# Altium PCB micromouse.PcbDoc (part 2 of 2)
Units mm, origin at the board's own origin, x right, y up, seen from the top; angles counter-clockwise.
Board outline 70.05 x 99.97 mm, 2 copper layers (Top, Bottom); 176 components, 116 nets, 553 pads, 232 vias.
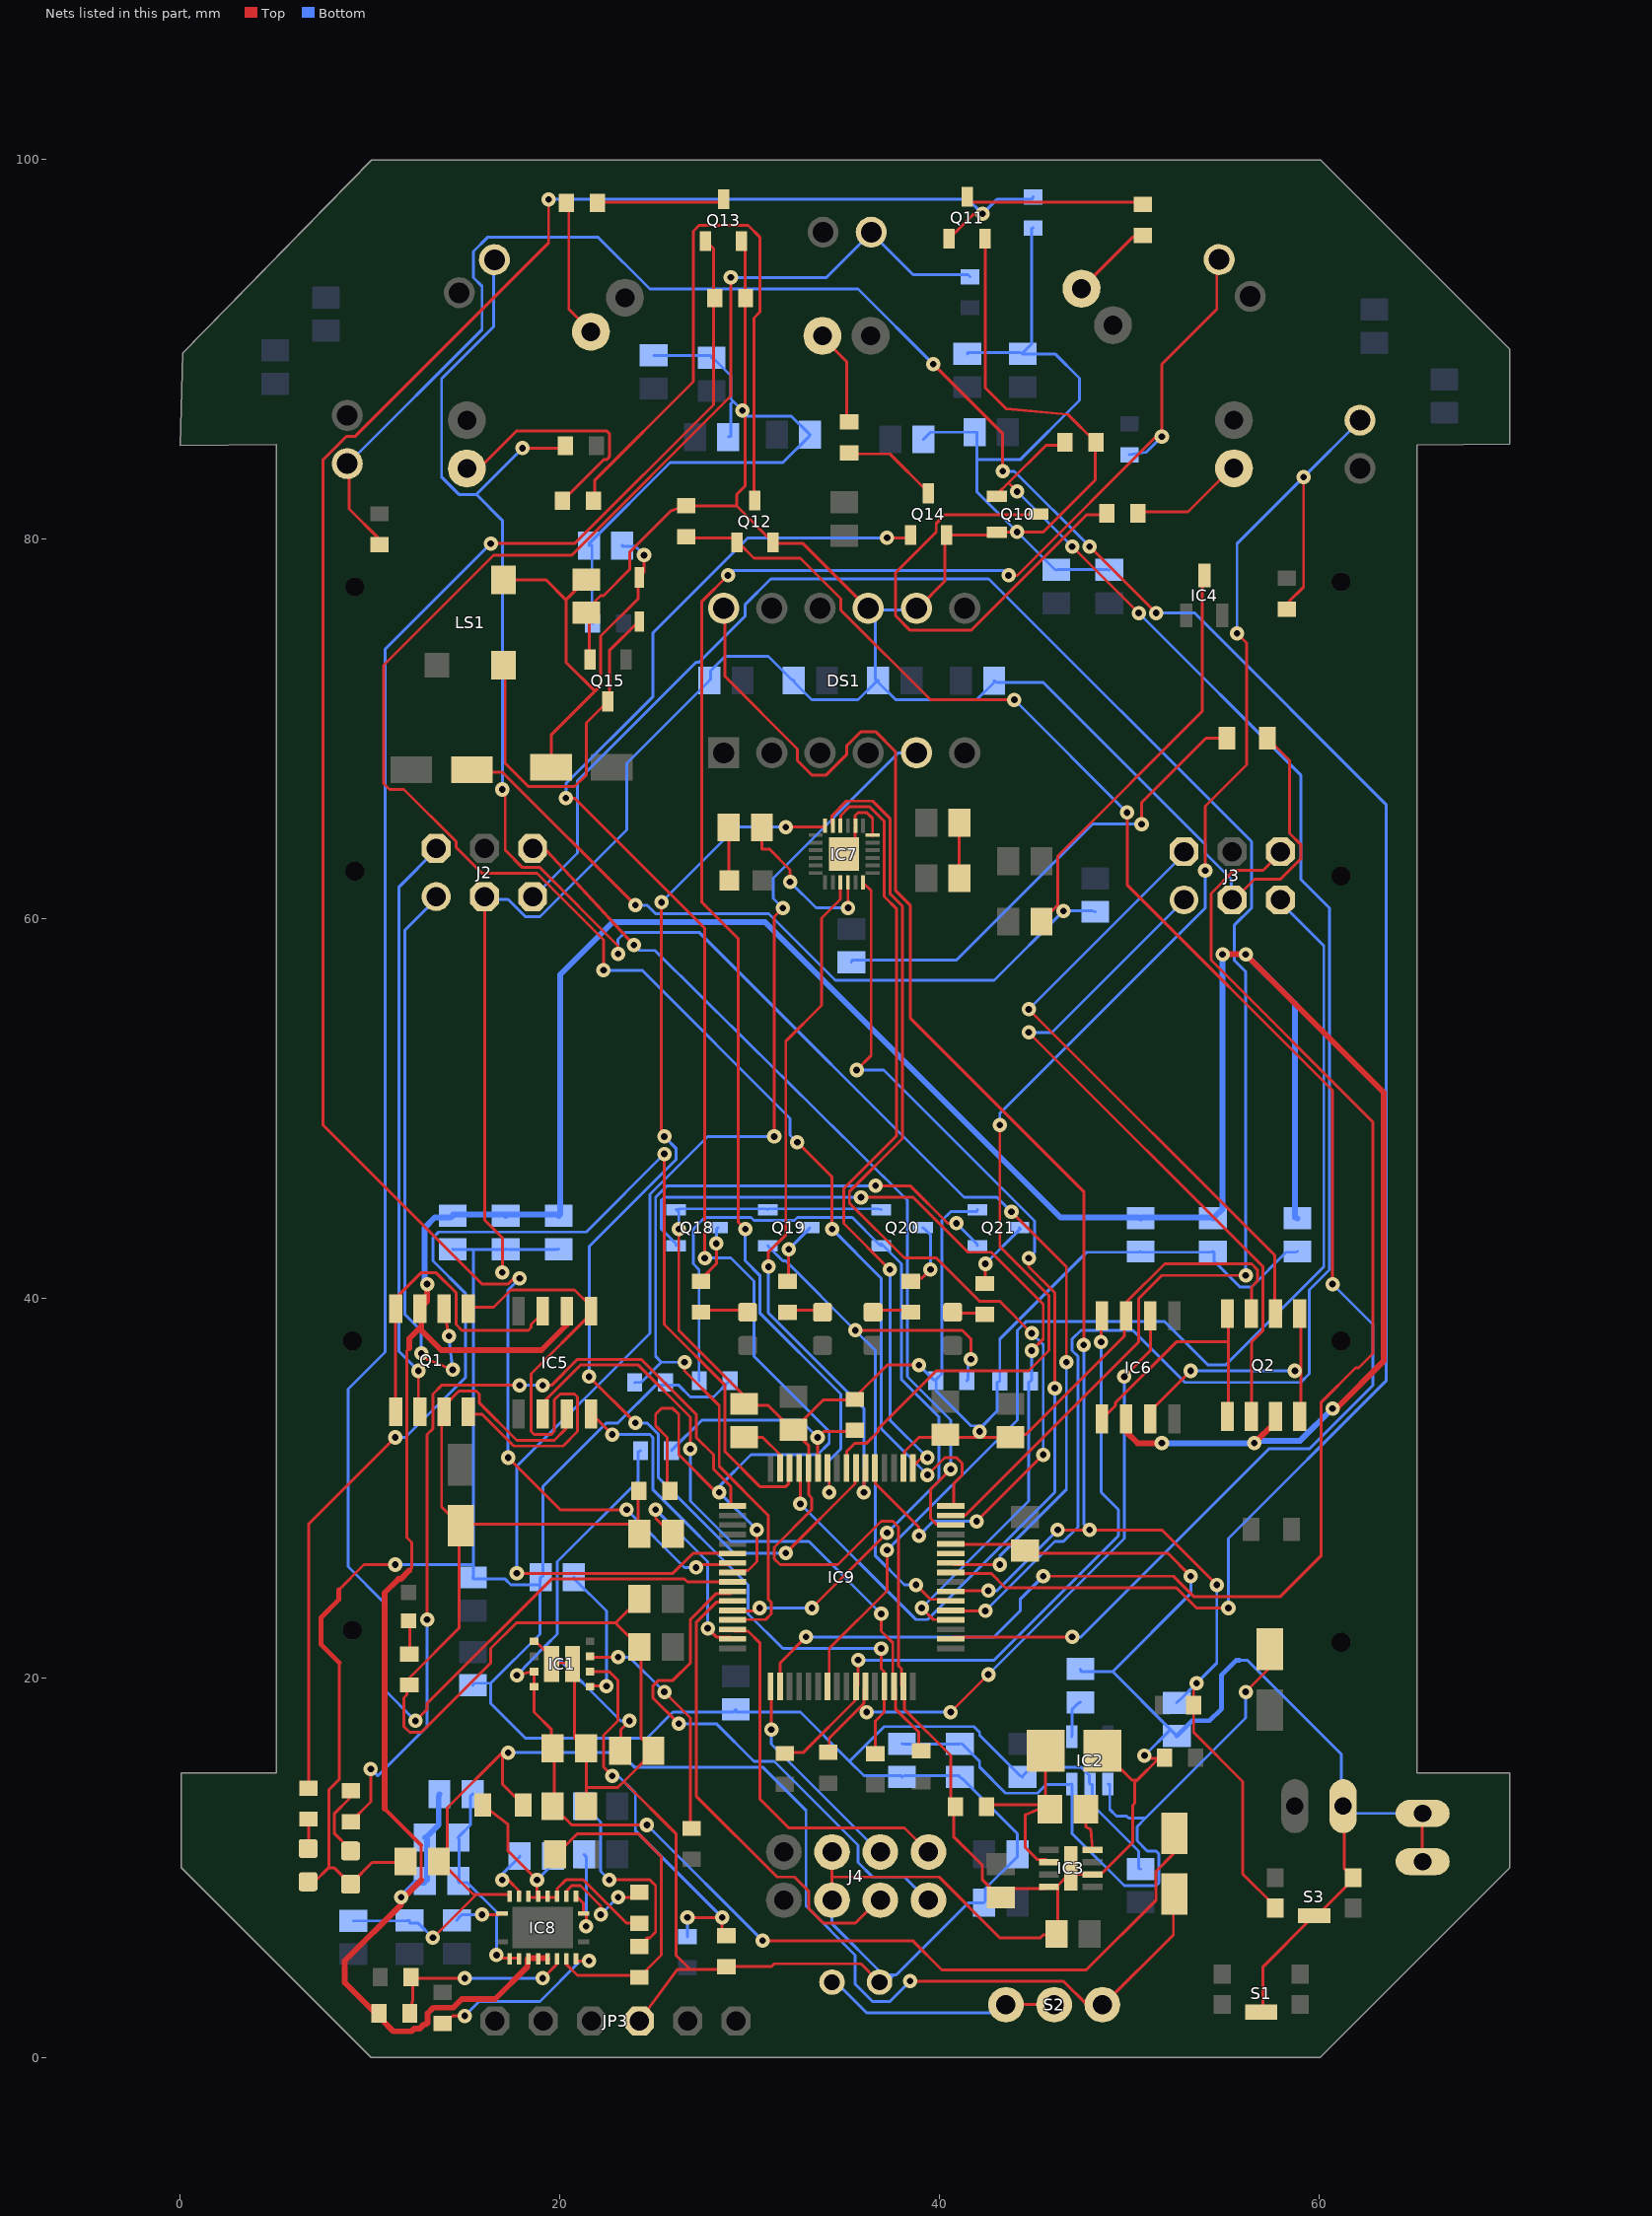
[diagram p2: the nets of this part, all layers, seen from the top]

## Via types
v1: diameter 0.756/0.756 (per signal layer), hole 0.35, Top to Bottom, 232 vias

## Nets (pads, with @x,y where several pads share a name; then routed paths per layer and width w, separated by ;. In a path a pad name is that pad's centre, name@x,y a point inside that pad or via, vN(x,y) a via of type N, cw(c..) or ccw(c..) an arc to the next point about the centre after c; other vN are vias at no path point) (continued)
GND: C3.3V_1.1 C3.3V_2.1 C3.3V_7.1 C5V4_5.2 C5V_2.1 C_3.3V_5.1 C_3.3V_6.1 C_5V4_4.1 C_5V_1.1 C_A3.3V_1.1 C_A3.3V_3.1 C_BAT.2 C_DSP1.2 C_DSP2.2 C_DSP3.2 C_EM1.2 C_EM2.2 C_EM3.2 C_EM4.2 C_EM5.2 C_EM6.2 C_EM7.2 C_EM8.2 C_EM9.2 C_EM10.2 C_EM11.2 C_EM12.1 C_M1.2 C_M2.1 C_M4.1 C_M5.2 C_MB_L.1 C_MB_R.1 C_RST.2 C_SS1.1 C_V1.1 C_V2.2 C_V3.2 C_V4.2 C_VA1.2 C_VA2.2 C_VBAT1.2 C_VBAT2.2 C_VBAT3.1 C_VBAT4.1 C_VCAP1.1 C_VCAP2.2 CNR.1 CVC1.+ D22.C D23.C DS1.8 DS1.9 IC1.5 IC1.9 IC1.10 IC2.2 IC3.4 IC3.6 IC3.9 IC5.3 IC6.3 IC9.12 IC9.18 IC9.28 IC9.63 J1.2 J2.3 J3.3 J4.3 J4.4 JP1.1 JP2.1 JP2.2 JP3.3 L1.1 L5.1 Q1.3 Q2.3 Q10.2 Q11.2 Q12.2 Q13.2 Q14.2 Q15.2 Q18.2 Q19.2 Q20.2 Q21.2 R_FBB2.1 R_LED1_PULLUP1.1 R_LED1_PULLUP2.1 R_LED1_PULLUP3.1 R_LED1_PULLUP.1 R_LED6.2 R_PWR1.1 R_R9.1 R_R11.1 R_R13.1 R_R15.1 R_R16.1 R_R18.1 R_VM2.1 RB1.1 S1.5 S3.4 S3.5 | length 730
  Top w0.152: D23.C@6.753,9.202 D23.C@6.731,9.255 7.074,9.255 7.819,10 ; 7.819,9.964 7.819,10 ; 8.342,24.635 9.674,25.966 v1(11.325,25.966) ; 8.377,20.79 8.377,14.655 7.819,14.097 7.819,10 ; D22.C@8.886,9.202 D22.C@8.97,9.128 ; C_VBAT2.2@11.872,10.32 11.782,10.269 10.105,10.269 9.039,9.202 D22.C@8.97,9.128 ; J2.3@16.02,61.164 16.049,61.018 16.049,44.102 16.963,43.188 v1(16.963,41.359) ; IC1.5@18.638,21.934 18.64,21.852 18.792,21.852 19.554,21.09 19.554,20.785 IC1.9@19.563,20.734 19.707,20.785 20.621,20.785 IC1.10@20.663,20.734 20.773,20.632 20.773,16.822 21.231,16.365 C_VBAT1.2@21.369,16.289 21.383,16.213 21.383,14.232 ; IC5.3@20.367,33.898 20.316,33.891 20.316,33.129 19.707,32.52 17.725,32.52 15.744,34.501 15.744,34.958 15.592,35.11 14.677,35.11 13.915,34.348 13.915,34.044 Q1.3@13.89,34.024 13.763,33.891 13.763,29.014 14.677,28.1 L5.1@14.779,28.024 ; C_VBAT3.1@21.369,13.241 21.383,13.317 21.383,14.232 ; Q15.2@21.576,73.65 21.535,73.668 21.535,75.954 21.383,76.106 C_EM12.1@21.383,76.12 21.383,76.258 22.145,77.02 22.297,77.02 23.669,78.392 23.669,79.306 25.85,81.487 R_R13.1@26.654,81.764 26.692,81.745 29.308,81.745 ; R_R16.1@24.163,29.853 24.126,29.776 C_VCAP2.2@24.126,28.1 ; C_VA1.2@24.191,24.163 23.009,22.981 23.009,22.893 ; JP3.3@24.193,1.923 26.181,4.63 26.869,4.63 ; v1(26.26,43.645) 26.26,38.311 29.613,34.958 29.613,34.501 C_VCAP1.1@29.709,34.436 29.765,34.348 30.984,34.348 32.203,33.129 C_BAT.2@32.305,33.067 ; Q13.2@29.572,95.707 29.613,95.613 29.765,95.461 29.765,92.718 R_R15.1@29.783,92.697 29.765,92.565 v1@29.765,86.774 ; v1(29.613,86.774) v1@29.765,86.774 ; J4.3@34.337,8.288 34.337,9.507 ; J4.4@34.337,10.828 34.337,9.507 ; DS1.9@36.242,76.36 36.166,76.411 32.813,79.764 31.289,79.764 Q12.2@31.223,79.832 31.137,79.916 29.308,81.745 ; J1.2@36.837,3.97 36.775,4.021 35.861,4.935 31.289,4.935 31.137,4.783 28.851,4.783 R_FBB2.1@28.764,4.781 28.698,4.63 26.869,4.63 ; IC9.18@38.095,31.056 38.147,31.148 38.147,31.91 38.909,32.672 40.281,32.672 C_V3.2@40.306,32.813 40.433,32.672 v1@42.109,32.672 ; DS1.8@38.782,76.36 38.909,76.411 40.281,77.782 40.281,80.068 Q14.2@40.367,80.213 40.433,80.221 42.871,80.221 Q10.2@43.016,80.363 43.024,80.373 v1(44.091,80.373) 45.462,80.373 48.205,83.116 48.205,84.945 R_R9.1@48.234,85.095 46.76,86.569 43.523,86.859 42.414,87.968 42.414,95.766 Q11.2@42.399,95.834 ; v1(38.909,36.482) 37.233,36.482 35.556,34.806 R_VM2.1@35.531,34.669 35.404,34.653 33.88,34.653 32.356,33.129 C_BAT.2@32.305,33.067 ; IC9.12@40.595,27.056 40.738,27.033 44.091,27.033 44.395,26.728 C_V2.2@44.497,26.717 44.548,26.576 52.015,26.576 v1(53.235,25.357) ; v1(42.109,32.977) v1@42.109,32.672 ; CVC1.+@48.588,16.161 50.126,14.623 50.424,14.623 ; v1(50.796,15.908) 50.796,15.756 R_LED6.2@51.557,15.756 ; R_LED6.2@51.851,15.793 51.711,15.756 R_LED6.2@51.557,15.756 ; J3.3@55.419,60.993 55.521,61.018 56.587,62.085 57.959,62.085 59.026,63.152 59.026,63.914 58.442,64.498 58.442,68.336 L1.1@57.267,69.511 ; Q2.3@56.435,39.194 56.435,40.597 56.74,40.902 56.74,41.511 56.435,41.816 51.863,41.816 49.882,39.835 49.882,39.073 IC6.3@49.831,39.066 49.729,38.92 49.729,38.006 44.548,32.824 43.786,32.824 C_V4.2@43.735,32.686 43.633,32.672 v1@42.109,32.672 ; S1.5@56.943,2.389 57.045,2.497 57.045,4.783 59.635,7.374 59.737,7.469 59.788,7.374 61.769,9.355 S3.4@61.787,9.469 61.769,9.507 61.312,9.964 61.312,13.165 JP1.1@61.261,13.241 ; JP2.1@65.452,10.32 65.427,10.422 65.427,12.86 JP2.2@65.452,12.86 ; 7.819,10 8.098,10 D22.C@8.97,9.128 ; L5.1@14.779,28.024 14.83,28.1 C_VCAP2.2@24.126,28.1 ; L5.1@14.779,28.024 14.677,27.948 14.677,22.614 12.087,20.023 12.087,19.718 12.063,19.63 11.934,19.566 11.934,19.108 11.782,18.956 11.782,17.432 12.087,17.127 12.696,17.127 16.354,20.785 16.354,21.547 17.7,22.893 23.009,22.893 ; 21.383,14.232 23.059,14.232 23.364,14.536 ; 23.009,22.893 23.009,22.805 C_VA2.2@24.191,21.623 24.279,21.547 24.279,16.822 24.888,16.213 C_VBAT4.1@24.925,16.162 24.888,16.06 23.364,14.536 ; 23.364,14.536 26.107,11.793 26.107,5.392 26.869,4.63 ; C_VCAP2.2@24.126,28.1 C_VCAP2.2@24.191,27.592 24.126,27.643 C_VCAP2.2@24.126,28.1 ; 29.308,81.745 29.308,82.354 29.765,82.812 v1@29.765,86.774 ; C_BAT.2@32.305,33.067 32.356,32.977 33.118,32.215 33.118,31.148 IC9.28@33.095,31.056 33.118,30.996 33.118,29.624 33.27,29.472 33.27,28.862 31.289,26.881 31.289,26.271 31.594,25.966 34.642,25.966 36.928,28.252 37.537,28.252 37.842,27.948 37.842,20.632 37.995,20.48 37.995,19.566 IC9.63@38.095,19.556 38.147,19.413 38.147,18.346 40.585,15.908 40.585,13.48 RB1.1@40.835,13.21 40.738,13.147 40.738,11.641 42.262,10.117 42.262,9.355 43.176,8.44 C3.3V_2.1@43.227,8.429 43.329,8.44 43.786,8.898 45.615,8.898 IC3.4@45.76,8.994 ; 34.337,9.507 39.976,9.507 43.176,6.307 45.31,6.307 45.462,6.459 46.072,6.459 C_5V_1.1@46.162,6.51 46.224,6.612 IC3.4@46.224,9.05 ; IC3.4@45.76,8.994 IC3.4@46.224,9.05 ; IC3.4@45.76,8.994 45.767,9.05 IC3.4@46.224,9.05 ; IC3.4@46.224,9.05 IC3.9@46.834,9.66 ; IC3.9@46.834,9.66 IC3.9@46.91,9.969 46.834,9.964 IC3.9@46.834,9.66 ; IC3.9@46.834,9.66 48.053,9.66 IC3.6@48.06,9.644 48.205,9.66 48.51,9.66 50.187,11.336 50.187,13.291 50.287,13.391 50.287,14.486 50.424,14.623 ; 50.424,14.623 R_LED6.2@51.557,15.756
  Top w0.254: 8.342,24.635 8.342,24.111 7.419,23.188 7.419,21.748 8.377,20.79
  Bottom w0.152: v1(11.325,25.966) 15.439,25.966 ; C_MB_L.1@14.351,42.592 14.373,42.578 15.439,42.578 ; C_5V4_4.1@15.414,19.605 15.439,19.718 16.354,19.718 ; J2.3@16.02,61.164 16.049,61.018 17.268,61.018 18.183,60.104 18.945,60.104 23.517,64.676 23.517,68.181 27.784,72.448 C_DSP3.2@27.874,72.55 27.936,72.601 27.936,73.058 28.698,73.82 30.984,73.82 32.203,72.601 C_DSP1.2@32.319,72.55 32.356,72.448 33.27,71.534 35.709,71.534 36.623,72.448 C_DSP2.2@36.764,72.55 ; v1(16.963,41.359) C_M2.1@16.963,42.578 ; C_M1.2@19.939,42.592 19.859,42.578 17.268,42.578 C_M2.1@17.145,42.592 ; R_R18.1@21.717,75.553 21.688,75.649 21.688,79.662 C_EM11.2@21.524,79.662 21.535,79.764 25.803,84.031 31.746,84.031 33.118,85.402 C_EM5.2@33.18,85.504 33.118,85.555 32.203,86.469 29.613,86.469 v1(29.613,86.774) 29.127,87.26 ; C_EM7.2@24.939,89.681 25.041,89.67 27.936,89.67 C_EM8.2@27.987,89.554 28.089,89.517 29.003,88.603 29.003,87.384 29.127,87.26 ; v1(26.26,43.645) 26.26,44.559 Q18.2@26.125,44.671 26.26,44.712 30.832,44.712 Q19.2@30.951,44.671 30.984,44.712 36.775,44.712 Q20.2@36.92,44.671 ; C_EM6.2@28.862,85.377 29.003,85.402 29.003,87.136 29.127,87.26 ; R_LED1_PULLUP2.1@28.97,35.66 28.851,35.568 28.089,34.806 26.869,34.806 26.26,35.415 25.65,35.415 R_LED1_PULLUP3.1@25.569,35.562 25.498,35.415 25.041,35.415 23.059,33.434 22.45,33.434 19.097,30.081 19.097,25.357 C_SS1.1@18.984,25.306 ; J4.3@34.337,8.288 34.337,7.043 37.029,4.351 37.587,4.351 ; J1.2@36.775,4.021 J1.2@36.837,3.97 37.206,3.97 37.587,4.351 ; DS1.8@38.782,76.36 38.757,76.258 36.928,76.258 DS1.9@36.623,75.954 ; v1(38.909,36.482) 39.671,35.72 R_LED1_PULLUP1.1@39.803,35.653 ; C_EM10.2@39.149,85.25 39.53,85.631 C_EM9.2@41.844,85.631 41.957,85.631 41.957,84.183 ; C_EM3.2@41.463,89.761 41.5,89.822 44.243,89.822 C_EM4.2@44.384,89.761 ; Q21.2@42,44.671 41.957,44.559 40.585,44.559 40.128,44.102 40.128,36.025 39.823,35.72 R_LED1_PULLUP1.1@39.803,35.653 ; v1(42.109,32.977) v1@42.109,33.282 ; R_R11.1@44.932,96.398 44.853,96.375 44.853,90.279 44.395,89.822 C_EM4.2@44.384,89.761 ; CNR.1@47.418,20.466 47.443,20.328 49.12,20.328 ; C_EM2.2@48.942,78.378 48.815,78.392 46.224,78.392 C_EM1.2@46.148,78.378 46.072,78.392 v1(44.091,80.373) 41.957,82.507 41.957,84.183 ; C_3.3V_6.1@50.593,9.925 50.491,9.964 50.491,10.879 48.053,13.317 48.053,14.384 IC2.2@47.919,14.401 47.901,14.536 47.901,14.841 47.443,15.298 44.853,15.298 44.395,14.841 C_A3.3V_3.1@44.37,14.779 44.243,14.841 42.109,16.975 42.109,17.127 41.805,17.432 37.08,17.432 35.251,15.603 ; v1(50.796,15.908) C_RST.2@52.168,17.28 ; v1(53.235,25.357) 53.235,24.442 49.12,20.328 ; J3.3@55.419,60.993 55.368,61.018 55.368,62.085 53.997,63.457 53.997,63.914 45.462,72.448 43.024,72.448 C5V_2.1@42.874,72.54 42.871,72.448 41.957,71.534 37.69,71.534 36.775,72.448 C_DSP2.2@36.764,72.55 ; 55.8,20.937 56.206,20.937 61.159,15.984 61.159,13.317 JP1.1@61.261,13.241 61.312,13.165 61.617,12.86 JP2.2@65.452,12.86 ; C_MB_R.1@58.848,42.465 58.721,42.426 58.264,42.426 56.435,40.597 55.825,40.597 54.454,41.968 54.454,42.426 C_M4.1@54.403,42.465 54.301,42.426 50.644,42.426 C_M5.2@50.593,42.465 50.491,42.426 47.748,42.426 43.176,37.854 43.176,35.72 R_LED1_PULLUP.1@43.171,35.635 43.024,35.568 43.024,34.044 42.262,33.282 v1@42.109,33.282 ; 15.439,25.966 15.439,42.578 ; 15.439,25.966 15.439,25.357 C5V4_5.2@15.414,25.292 15.439,25.204 17.116,25.204 17.421,24.9 C_SS1.1@18.945,24.9 ; 15.439,42.578 C_M2.1@16.963,42.578 ; 16.354,19.718 16.354,18.651 18.183,16.822 24.583,16.822 25.955,18.194 29.155,18.194 C_V1.1@29.257,18.335 29.308,18.194 32.661,18.194 35.251,15.603 ; 16.354,19.718 18.945,22.309 C_SS1.1@18.945,24.9 ; C_M2.1@16.963,42.578 C_M2.1@17.145,42.592 ; C_M2.1@16.963,42.578 17.116,42.578 C_M2.1@17.145,42.592 ; C_SS1.1@18.945,24.9 C_SS1.1@18.984,25.306 ; C_SS1.1@18.945,24.9 18.945,25.204 C_SS1.1@18.984,25.306 ; 35.251,15.603 36.013,14.841 37.995,14.841 C_3.3V_5.1@38.02,14.779 38.147,14.841 41.043,14.841 C_A3.3V_1.1@41.068,14.779 41.195,14.689 44.091,11.793 44.091,10.726 C3.3V_1.1@44.102,10.701 44.091,10.574 42.414,8.898 42.414,8.288 C3.3V_7.1@42.352,8.161 42.262,8.136 41.5,8.136 37.715,4.351 37.587,4.351 ; DS1.9@36.623,75.954 DS1.9@36.242,76.36 36.318,76.258 DS1.9@36.623,75.954 ; DS1.9@36.623,75.954 36.623,72.601 C_DSP2.2@36.764,72.55 ; R_LED1_PULLUP1.1@39.803,35.653 39.823,35.568 39.823,35.11 41.652,33.282 v1@42.109,33.282 ; 41.957,84.183 44.243,84.183 47.367,87.307 47.367,88.476 46.081,89.761 C_EM4.2@44.384,89.761 ; 49.12,20.328 C_RST.2@52.168,17.28 ; C_RST.2@52.168,17.28 C_RST.2@52.498,16.938 52.473,16.975 C_RST.2@52.168,17.28
  Bottom w0.254: C_RST.2@52.498,16.938 53.302,17.742 54.224,17.742 54.859,18.377 54.859,20.155 55.641,20.937 55.8,20.937
INT: IC7.12 IC9.29 | length 58.7
  Top w0.152: IC9.29@32.595,31.056 32.661,30.996 v1(32.661,29.167) ; v1(35.632,52.027) 36.394,52.789 36.394,61.483 IC7.12@35.972,61.906 ; v1(44.7,42.121) 44.7,41.664 46.072,40.292 v1(46.072,35.263)
  Bottom w0.152: v1(32.661,29.167) 38.757,23.071 39.366,23.071 46.072,29.776 v1(46.072,35.263) ; v1(35.632,52.027) 37.059,52.027 45.005,44.08 45.005,42.426 v1(44.7,42.121)
JTCK: IC9.49 J4.6 | length 11.1
  Top w0.152: IC9.49@31.095,19.556 31.137,19.413 v1(31.137,17.28)
  Bottom w0.152: v1(31.137,17.28) 31.137,16.518 36.775,10.879 J4.6@36.877,10.828
JTMS: IC9.46 J4.8 | length 20
  Top w0.152: IC9.46@29.095,22.556 29.155,22.461 29.917,22.461 30.527,21.852 30.527,13.622 32.051,12.098 38.147,12.098 J4.8@39.417,10.828
L_EMITTER: IC9.2 Q12.1 R_R13.2 | length 92.9
  Top w0.152: R_R13.2@26.654,80.134 26.692,80.068 29.155,80.068 29.308,79.916 Q12.1@29.323,79.832 29.46,79.764 30.222,79.002 32.661,79.002 34.794,76.868 34.794,76.258 39.519,71.534 v1(43.938,71.534) ; IC9.2@40.595,22.056 40.738,22.156 v1(46.986,22.156) ; v1(49.882,65.59) 49.882,61.78 60.702,50.96 v1(60.702,40.749)
  Bottom w0.152: v1(43.938,71.534) v1(49.882,65.59) ; v1(46.986,22.156) 47.443,22.156 57.349,32.062 59.483,32.062 62.836,35.415 62.836,38.616 v1(60.702,40.749)
L_RECEIVER_1: IC9.9 Q8.1 R_R6.2 | length 142.4
  Top w0.152: Q8.1@8.796,83.976 8.886,83.878 8.886,81.592 10.41,80.068 10.41,79.764 R_R6.2@10.491,79.7 ; v1(39.671,89.212) 43.329,85.555 v1(43.329,83.574) ; IC9.9@40.595,25.556 40.738,25.509 42.719,25.509 43.481,24.747 52.473,24.747 53.539,23.68 v1(55.216,23.68) ; v1(47.901,79.611) v1(51.406,76.106)
  Bottom w0.152: Q8.1@8.796,83.976 8.886,84.031 15.897,91.041 15.897,93.327 15.439,93.784 15.439,95.156 16.201,95.918 21.993,95.918 24.736,93.175 35.709,93.175 v1(39.671,89.212) ; v1(43.329,83.574) 43.938,83.574 v1(47.901,79.611) ; v1(51.406,76.106) 53.438,76.106 63.522,66.022 63.522,35.644 55.216,27.338 v1(55.216,23.68)
LED1: IC9.4 Q18.1 R_LED1_PULLUP.2 | length 45.7
  Top w0.152: v1(35.861,45.321) 38.604,45.321 41.5,42.426 42.719,42.426 45.462,39.682 45.462,37.854 v1(44.853,37.244) ; v1(39.061,23.68) 39.671,23.071 40.585,23.071 IC9.4@40.595,23.056
  Bottom w0.152: Q18.1@26.125,42.771 26.107,42.883 25.345,43.645 25.345,45.169 25.498,45.321 v1(35.861,45.321) ; v1(39.061,23.68) 44.7,29.319 44.7,35.568 R_LED1_PULLUP.2@44.801,35.635 44.853,35.72 v1(44.853,37.244)
LED2: IC9.6 Q19.1 R_LED1_PULLUP1.2 | length 32.4
  Top w0.152: v1(35.556,38.311) 41.195,38.311 41.652,37.854 v1(41.652,36.787) ; v1(38.757,24.9) 39.519,24.138 40.585,24.138 IC9.6@40.595,24.056
  Bottom w0.152: Q19.1@30.951,42.771 30.984,42.73 31.746,41.968 31.899,41.968 v1(35.556,38.311) 36.623,37.244 36.623,26.424 38.147,24.9 v1(38.757,24.9) ; R_LED1_PULLUP1.2@41.433,35.653 41.5,35.72 41.5,36.634 v1(41.652,36.787)
LED3: IC9.44 Q20.1 R_LED1_PULLUP2.2 | length 46.6
  Top w0.152: IC9.44@29.095,23.556 29.155,23.528 30.375,23.528 v1(30.527,23.68) ; v1(33.27,23.68) v1(37.233,27.643)
  Bottom w0.152: R_LED1_PULLUP2.2@27.34,35.66 27.327,35.72 27.327,41.511 27.022,41.816 27.022,43.645 27.631,44.254 30.07,44.254 30.222,44.102 32.356,44.102 32.508,44.254 35.404,44.254 36.775,42.883 Q20.1@36.92,42.771 36.928,42.883 37.995,41.816 37.995,35.72 39.976,33.739 39.976,30.386 v1(37.233,27.643) ; v1(30.527,23.68) v1(33.27,23.68)
LED4: IC9.45 Q21.1 R_LED1_PULLUP3.2 | length 47.8
  Top w0.152: v1(26.565,36.634) 26.565,36.177 28.393,34.348 28.393,31.148 30.984,28.557 30.984,24.138 31.137,23.985 31.137,23.376 30.832,23.071 29.155,23.071 IC9.45@29.095,23.056 ; v1(36.623,45.931) 38.452,45.931 40.433,43.95 v1(40.89,43.95)
  Bottom w0.152: R_LED1_PULLUP3.2@23.939,35.562 23.974,35.568 24.279,35.568 25.345,36.634 ; v1(26.565,36.634) 25.345,36.634 ; v1(36.623,45.931) 25.65,45.931 25.041,45.321 25.041,36.939 25.345,36.634 ; v1(40.89,43.95) 41.957,42.883 Q21.1@42,42.771
LED7: IC9.30 R_LED8.1 | length 69.5
  Top w0.152: R_LED8.1@6.752,14.191 6.753,14.232 6.753,28.1 v1(11.325,32.672) ; v1(25.498,47.607) 25.498,38.616 28.698,35.415 28.698,31.91 30.527,30.081 31.899,30.081 32.051,30.234 32.051,30.996 IC9.30@32.095,31.056
  Bottom w0.152: v1(11.325,32.672) 11.858,32.672 15.033,35.847 15.033,40.241 13.306,41.968 13.306,43.188 13.611,43.492 21.383,43.492 v1(25.498,47.607)
LED8: IC9.33 R_LED9.2 | length 46.5
  Top w0.152: R_LED9.2@8.982,12.42 10.033,13.471 v1(10.033,15.203) ; v1(13.001,23.071) 13.001,32.824 13.306,33.129 13.306,34.958 13.763,35.415 v1(17.878,35.415) ; v1(19.097,35.415) 19.554,35.415 20.926,36.787 24.279,36.787 27.174,33.891 27.174,32.672 28.089,31.758 28.089,30.996 29.003,30.081 29.003,29.167 IC9.33@29.095,29.056
  Bottom w0.152: v1(10.033,15.203) 10.41,14.841 13.001,17.432 v1(13.001,23.071) ; v1(17.878,35.415) v1(19.097,35.415)
LENCHA: IC9.14 J2.6 | length 46.9
  Top w0.152: J2.6@18.56,63.704 18.64,63.609 19.275,63.609 v1(23.895,58.616) ; v1(40.585,30.996) 39.519,29.929 39.519,28.405 39.823,28.1 40.585,28.1 IC9.14@40.595,28.056
  Bottom w0.152: v1(23.895,58.616) 24.16,58.351 24.996,58.328 38.299,45.169 38.299,35.872 40.585,33.586 v1(40.585,30.996)
LENCHB: IC9.15 J2.5 | length 98.7
  Top w0.152: IC9.15@40.595,28.556 40.738,28.557 41.347,28.557 50.491,37.701 50.491,39.987 51.711,41.206 v1(56.13,41.206)
  Bottom w0.152: J2.5@18.56,61.164 18.64,61.171 20.926,63.457 20.926,67.267 27.174,73.515 27.327,73.515 29.765,75.954 29.765,76.563 31.111,77.909 42.592,77.909 56.435,64.066 56.435,60.561 55.521,59.647 55.521,57.818 56.13,57.208 v1(56.13,41.206)
LF_EMITTER: IC9.5 Q10.1 R_R9.2 | length 91.8
  Top w0.152: IC9.5@40.595,23.556 40.738,23.528 v1(42.414,23.528) ; Q10.1@43.016,82.263 43.024,82.354 43.633,82.964 ; v1(44.091,82.507) 43.633,82.964 ; R_R9.2@46.604,85.095 46.529,84.945 45.615,84.945 43.633,82.964 ; v1(46.986,79.611) v1(50.491,76.106)
  Bottom w0.152: v1(42.414,23.528) 46.072,27.186 46.529,27.186 47.291,27.948 47.291,36.939 46.986,37.244 46.986,37.854 47.443,38.311 50.187,38.311 52.93,35.568 59.026,35.568 59.483,36.025 59.483,40.444 60.55,41.511 60.55,60.561 59.026,62.085 59.026,67.572 v1(50.491,76.106) ; v1(44.091,82.507) v1(46.986,79.611)
LF_RECEIVER: IC9.10 Q9.1 R_R7.2 | length 100
  Top w0.152: v1(16.963,66.81) 17.116,66.657 17.116,63.609 18.03,62.695 18.945,62.695 23.059,58.58 v1(23.059,58.148) ; v1(18.03,84.793) 20.164,84.793 R_R7.2@20.292,84.918 ; IC9.10@40.595,26.056 40.738,25.966 v1(43.176,25.966) ; v1(43.786,44.559) 46.681,41.664 v1(46.681,36.634)
  Bottom w0.152: Q9.1@16.547,94.722 16.506,94.699 16.506,91.194 13.763,88.45 13.763,83.269 14.677,82.354 15.592,82.354 ; v1(16.963,66.81) 16.963,80.983 15.592,82.354 ; v1(18.03,84.793) 15.592,82.354 ; v1(23.059,58.148) 23.059,58.91 23.415,59.266 27.352,59.266 41.297,45.321 43.024,45.321 v1(43.786,44.559) ; v1(43.176,25.966) 43.176,26.424 46.681,29.929 v1(46.681,36.634)
  Bottom w0.254: Q9.1@16.506,94.699 16.523,94.699 Q9.1@16.547,94.722
LPWMA: IC5.2 IC9.62 R_PWMUP_1.1 | length 35.4
  Top w0.152: IC5.2@19.097,33.898 19.097,34.501 21.078,36.482 24.126,36.482 26.869,33.739 v1(26.869,32.062) ; v1(36.928,23.376) 36.928,22.461 37.537,21.852 37.537,19.566 IC9.62@37.595,19.556 37.69,19.413 37.69,18.346 38.909,17.127 38.909,16.213 R_PWMUP_1.1@39.036,16.162
  Bottom w0.152: v1(26.869,32.062) 26.869,29.319 29.003,27.186 33.118,27.186 v1(36.928,23.376)
LPWMB: IC5.4 IC9.61 R_PWMUP_2.1 | length 28.7
  Top w0.152: IC5.4@21.637,33.898 21.688,33.891 v1(22.755,32.824) ; R_PWMUP_2.1@36.616,16.007 36.623,16.06 36.623,17.737 37.08,18.194 37.08,19.413 IC9.61@37.095,19.556 37.08,19.566 37.08,20.328 36.928,20.48 v1(36.928,21.547)
  Bottom w0.152: v1(22.755,32.824) 24.736,32.824 24.888,32.672 24.888,29.929 29.917,24.9 29.917,23.376 31.746,21.547 v1(36.928,21.547)
M_EMITTER: IC9.40 Q14.1 R_R16.2 | length 91.2
  Top w0.152: v1(20.316,66.352) 20.773,66.352 27.631,59.494 v1(27.631,42.121) ; R_R16.2@25.793,29.853 25.65,29.929 25.65,32.672 25.041,33.282 25.041,33.891 25.345,34.196 25.955,34.196 26.26,33.891 26.26,31.758 28.241,29.776 v1(28.393,29.776) ; IC9.40@29.095,25.556 29.155,25.662 29.917,25.662 30.375,26.119 v1(30.375,27.795) ; v1(37.233,80.068) 38.452,80.068 Q14.1@38.467,80.213
  Bottom w0.152: v1(20.316,66.352) 20.316,67.114 24.888,71.686 24.888,75.039 29.917,80.068 v1(37.233,80.068) ; v1(27.631,42.121) 29.003,42.121 30.222,40.902 30.222,36.939 34.185,32.977 34.185,32.367 33.575,31.758 30.07,31.758 28.393,30.081 v1(28.393,29.776) v1(30.375,27.795)
MID_RECEIVER: IC9.16 Q3.1 R_R1.2 | length 107.7
  Top w0.152: v1(22.297,57.285) 22.297,58.885 18.792,62.39 15.897,62.39 14.525,63.762 14.525,64.066 11.782,66.81 11.02,66.81 10.715,67.114 10.715,73.363 16.506,79.154 20.621,79.154 29.003,87.536 v1(29.003,93.784) ; v1(32.508,48.217) 34.337,46.388 v1(34.337,43.645) ; v1(39.366,30.691) 40.281,31.605 40.89,31.605 41.195,31.3 41.195,30.691 40.738,30.234 40.738,29.167 IC9.16@40.595,29.056
  Bottom w0.152: v1(22.297,57.285) 24.329,57.285 32.127,49.487 32.127,48.598 v1(32.508,48.217) ; v1(29.003,93.784) 34.032,93.784 36.318,96.07 Q3.1@36.401,96.171 36.471,96.07 38.604,93.937 41.5,93.937 R_R1.2@41.602,93.824 ; v1(34.337,43.645) 36.928,41.054 36.928,33.129 v1(39.366,30.691)
N$1: C_SS1.2 IC1.1 | length 7.3
  Top w0.152: IC1.1@21.588,19.534 21.688,19.566 v1(22.45,19.566)
  Bottom w0.152: C_SS1.2@20.734,25.306 20.773,25.204 22.45,23.528 v1(22.45,19.566)
N$2: IC5.7 Q1.1 Q1.8 | length 17.1
  Top w0.152: Q1.1@11.35,34.024 11.325,34.044 11.325,39.378 Q1.8@11.35,39.448 11.477,39.53 11.477,40.14 12.696,41.359 13.458,41.359 14.525,40.292 14.525,38.616 14.83,38.311 18.335,38.311 18.487,38.463 18.487,38.616 19.097,39.225 IC5.7@19.097,39.32
N$3: IC1.3 R_PG1.2 | length 12.5
  Top w0.152: IC1.3@21.588,21.134 21.688,21.09 v1(23.059,21.09) ; v1(25.498,19.261) 26.869,17.889 26.869,12.098 R_PG1.2@26.931,12.065
  Bottom w0.152: v1(23.059,21.09) 23.669,21.09 v1(25.498,19.261)
N$4: C_3.3V_5.2 C_A3.3V_1.2 IC2.1 IC2.3 L2.2 | length 38.2
  Top w0.152: v1(56.13,19.261) 57.349,20.48 57.349,21.394 L2.2@57.406,21.505
  Bottom w0.152: C_3.3V_5.2@38.02,16.529 38.147,16.518 41.043,16.518 C_A3.3V_1.2@41.068,16.529 41.195,16.518 42.109,15.603 42.109,15.298 43.481,13.927 45.157,13.927 45.615,14.384 46.834,14.384 IC2.3@46.969,14.401 46.986,14.384 46.986,11.793 49.729,9.05 51.406,9.05 51.558,9.202 51.558,10.726 51.406,10.879 50.949,10.879 50.405,11.423 50.405,12.163 50.849,12.608 ; IC2.1@48.869,14.401 48.967,14.384 48.97,14.381 48.97,13.066 49.326,12.71 49.857,12.71 49.96,12.608 50.849,12.608 ; v1(56.13,19.261) 56.13,17.889 50.849,12.608
N$5: IC3.8 RT1.2 | length 2.3
  Top w0.152: RT1.2@47.714,13.081 47.714,12.137 47.926,12.046 47.975,11.998 IC3.8@48.06,10.944
N$6: PWR_LED1.C R_PWR1.2 | length 1.8
  Top w0.152: PWR_LED1.C@12.018,23.004 12.087,22.918 12.087,21.394 R_PWR1.2@12.063,21.261
N$7: IC1.2 R_FBB2.2 R_FBT1.1 | length 21.1
  Top w0.152: IC1.2@21.588,20.334 21.688,20.328 22.602,20.328 23.059,19.87 23.059,17.737 22.297,16.975 22.297,15.298 v1(22.755,14.841) ; v1(26.717,7.374) v1(28.546,7.374) 28.546,6.612 28.698,6.459 R_FBB2.2@28.764,6.411
  Bottom w0.152: v1(22.755,14.841) 23.059,14.841 23.974,13.927 23.974,11.946 v1(28.546,7.374) ; R_FBT1.1@26.717,6.362 v1(26.717,7.374)
N$8: CVC1.- IC3.2 RB1.2 RT1.1 | length 11.5
  Top w0.152: RB1.2@42.465,13.21 42.877,13.317 45.915,13.317 RT1.1@45.814,13.081 ; CVC1.-@45.588,16.161 45.588,13.617 RT1.1@45.814,13.081 ; IC3.2@45.76,10.294 45.615,10.422 45.157,10.422 44.522,11.057 44.522,12.789 45.192,13.081 RT1.1@45.814,13.081
N$9: J1.1 S2.1 S2.2 | length 12.7
  Top w0.152: S2.1@43.497,2.78 43.633,2.802 45.919,2.802 S2.2@46.037,2.78
  Bottom w0.152: J1.1@34.337,3.97 34.337,3.868 34.642,3.868 36.166,2.344 43.176,2.344 43.481,2.649 S2.1@43.497,2.78
N$10: CNR.2 IC2.4 | length 2
  Bottom w0.152: IC2.4@46.969,16.901 46.986,16.975 46.986,18.346 47.291,18.651 CNR.2@47.418,18.716
N$11: IC6.7 Q2.1 Q2.8 | length 14.7
  Top w0.152: IC6.7@51.101,33.644 51.101,34.044 v1(53.235,36.177) ; v1(58.721,36.177) v1@59.026,36.177 ; Q2.8@58.975,33.77 59.026,33.891 v1@59.026,36.177 ; Q2.1@58.975,39.194 59.026,39.073 v1@59.026,36.177
  Bottom w0.152: v1(53.235,36.177) v1(58.721,36.177)
N$12: C5V_1.2 C5V_4.2 IC4.3 L4.2 | length 61.2
  Top w0.152: L4.2@15.363,67.851 15.439,67.724 16.963,67.724 v1(23.974,60.714) ; C5V_1.2@45.372,59.85 45.462,59.952 46.224,60.714 ; v1(46.529,60.409) 46.224,60.714 ; IC4.3@53.948,78.09 53.844,78.087 53.844,70.924 46.224,63.304 46.224,60.714
  Bottom w0.152: v1(23.974,60.714) 24.583,60.714 25.041,60.256 31.01,60.256 34.515,56.751 42.871,56.751 v1(46.529,60.409) 48.053,60.409 C5V_4.2@48.197,60.368
N$13: C_A3.3V.1 L1.2 | length 25.4
  Top w0.152: v1(50.644,64.981) 50.644,66.124 54.031,69.511 L1.2@55.132,69.511
  Bottom w0.152: C_A3.3V.1@35.353,57.705 35.404,57.818 40.89,57.818 48.053,64.981 v1(50.644,64.981)
N$14: IC6.5 Q2.4 Q2.5 | length 13.9
  Top w0.152: IC6.5@48.561,33.644 48.663,33.739 49.272,34.348 49.272,34.501 52.473,37.701 55.216,37.701 ; Q2.5@55.165,33.77 55.216,33.891 55.216,37.701 ; Q2.4@55.165,39.194 55.216,39.073 55.216,37.701
N$15: IC5.5 Q1.4 Q1.5 | length 28.3
  Top w0.152: Q1.4@15.16,34.024 15.287,33.891 15.897,33.891 17.573,32.215 20.164,32.215 20.926,32.977 20.926,34.806 20.773,34.958 20.011,34.958 19.707,34.653 19.707,32.977 19.554,32.824 18.64,32.824 18.487,32.977 18.487,36.025 21.688,39.225 IC5.5@21.637,39.32 21.535,39.378 21.535,39.682 20.773,40.444 17.421,40.444 16.506,39.53 15.287,39.53 Q1.5@15.16,39.448
N$16: J3.2 Q2.2 | length 33.2
  Top w0.152: v1(44.7,55.227) 57.654,42.273 57.654,39.225 Q2.2@57.705,39.194
  Bottom w0.152: v1(44.7,55.227) 52.93,63.457 J3.2@52.879,63.533
N$17: J2.2 Q1.2 | length 31
  Top w0.152: v1(12.544,36.177) 12.544,34.044 Q1.2@12.62,34.024
  Bottom w0.152: v1(12.544,36.177) 11.528,37.193 11.528,61.679 13.458,63.609 J2.2@13.48,63.704
N$18: J2.1 Q1.6 | length 30.2
  Top w0.152: v1(12.696,37.092) 13.001,36.787 v1(14.351,36.234) ; Q1.6@13.89,39.448 13.915,39.378 v1(14.148,38.012)
  Bottom w0.152: v1(12.696,37.092) 12.696,38.285 11.833,39.149 11.833,59.393 13.458,61.018 J2.1@13.48,61.164 ; v1(14.148,38.012) v1(14.351,36.234)
N$19: J3.1 Q2.6 | length 36.7
  Top w0.152: v1(44.7,54.008) 57.045,41.664 57.045,38.311 56.435,37.701 Q2.6@56.435,33.77
  Bottom w0.152: v1(44.7,54.008) 45.919,54.008 52.777,60.866 J3.1@52.879,60.993
N$20: IC7.18 IC7.20 IC7.25 | length 4.4
  Top w0.152: IC7.25@34.972,63.406 35.099,63.457 35.556,63.914 35.556,64.828 IC7.20@35.572,64.906 35.556,64.981 35.556,65.438 35.709,65.59 36.166,65.59 36.471,65.286 36.471,64.371 IC7.18@36.472,64.406
N$21: C_G3.2 C_G4.2 | length 2.9
  Top w0.152: C_G3.2@41.054,62.136 41.043,62.238 41.043,64.981 C_G4.2@41.054,65.057
N$22: C_G2.1 IC7.10 | length 8.7
  Top w0.152: C_G2.1@30.64,64.803 30.64,63.673 31.025,63.673 32.126,62.573 v1(32.126,61.938) ; IC7.10@35.172,61.906 35.172,60.92 35.226,60.866 35.226,60.613 v1(35.181,60.568)
  Bottom w0.152: v1(32.126,61.938) 33.496,60.568 v1(35.181,60.568)
N$24: C_G1.1 C_G2.2 | length 2.8
  Top w0.152: C_G2.2@28.89,64.803 28.889,62.02 C_G1.1@28.932,62.018
N$25: C_B3.2 IC8.10 | length 2.5
  Top w0.152: v1(15.897,7.526) 16.811,7.526 IC8.10@16.947,7.593
  Bottom w0.152: C_B3.2@14.568,7.221 14.677,7.374 14.83,7.526 v1(15.897,7.526)
N$26: C_B4.2 IC8.8 | length 3.1
  Top w0.152: v1(16.963,9.355) 17.268,9.355 17.878,8.745 17.878,8.593 IC8.8@17.847,8.493
  Bottom w0.152: v1(16.963,9.355) 16.963,9.66 17.878,10.574 C_B4.2@17.879,10.613
N$27: D1.C R_R8.2 | length 6.1
  Top w0.152: R_R8.2@50.442,81.356 50.491,81.44 53.082,81.44 55.368,83.726 D1.C@55.508,83.73
N$28: C_B4.1 IC8.4 IC8.5 IC8.6 IC8.7 L6.2 R_B2.1 | length 15.3
  Top w0.152: L6.2@15.931,13.306 17.268,12.296 17.268,10.879 v1(18.792,9.355) 18.792,8.593 IC8.6@18.847,8.493 ; IC8.7@18.347,8.493 18.335,8.44 18.792,8.44 IC8.6@18.847,8.493 ; R_B2.1@24.182,7.067 24.126,7.069 23.517,7.069 21.231,9.355 20.316,9.355 19.859,8.898 19.859,8.593 IC8.4@19.847,8.493 19.859,8.44 19.402,8.44 IC8.5@19.347,8.493 19.249,8.44 18.945,8.44 IC8.6@18.847,8.493
  Bottom w0.152: v1(18.792,9.355) 19.554,10.117 19.554,10.574 C_B4.1@19.629,10.613
N$29: IC8.19 R_B1.2 | length 9.8
  Top w0.152: R_B1.2@13.819,1.797 14.352,2.192 v1(14.982,2.192) ; IC8.19@20.847,5.193 20.926,5.088 v1(21.535,5.088)
  Bottom w0.152: v1(14.982,2.192) 15.744,2.954 18.945,2.954 21.078,5.088 v1(21.535,5.088)
N$30: C_B10.2 IC8.18 R_B3.2 | length 17.8
  Top w0.152: C_B10.2@19.746,10.701 19.859,10.726 20.926,11.793 24.126,11.793 25.345,10.574 25.345,5.392 24.279,4.326 R_B3.2@24.186,4.224 24.126,4.326 20.926,4.326 20.316,4.935 20.316,5.088 IC8.18@20.347,5.193
N$31: IC8.3 R_B2.2 | length 5.7
  Top w0.152: IC8.3@20.347,8.493 20.316,8.593 20.316,8.745 20.621,9.05 21.078,9.05 22.145,7.983 v1(22.145,7.526) ; v1(23.059,8.44) 23.974,8.44 24.126,8.593 R_B2.2@24.182,8.697
  Bottom w0.152: v1(22.145,7.526) v1(23.059,8.44)
N$32: C_B5.2 IC8.1 IC8.2 | length 5.7
  Top w0.152: IC8.2@20.847,8.493 20.926,8.44 21.231,8.136 21.231,7.678 IC8.1@21.247,7.593 21.383,7.526 v1(21.383,6.916)
  Bottom w0.152: C_B5.2@21.27,10.701 21.383,10.574 v1(21.383,6.916)
N$33: Q10.3 R_R8.1 | length 25.3
  Top w0.152: Q10.3@45.216,81.313 45.157,81.288 40.281,81.288 39.823,80.83 39.823,80.373 37.69,78.24 37.69,75.954 38.452,75.192 41.652,75.192 47.748,81.288 48.663,81.288 R_R8.1@48.812,81.356
N$34: C_B6.2 R_B3.1 | length 10.6
  Top w0.152: v1(22.602,9.355) 24.736,9.355 25.041,9.05 25.041,6.612 24.736,6.307 24.583,6.307 24.279,6.002 R_B3.1@24.186,5.854
  Bottom w0.152: C_B6.2@21.27,13.241 21.383,13.165 22.145,12.403 22.145,9.812 v1(22.602,9.355)
N$35: IC8.17 R_B4.1 R_B5.2 | length 10.3
  Top w0.152: R_B4.1@12.091,2.319 12.239,3.047 12.239,4.224 R_B5.2@12.159,4.237 12.27,4.173 v1(14.982,4.173) ; v1(19.097,4.173) 19.859,4.935 19.859,5.088 IC8.17@19.847,5.193
  Bottom w0.152: v1(14.982,4.173) v1(19.097,4.173)
N$37: Q14.3 R_R17.1 | length 5.1
  Top w0.152: R_R17.1@35.241,84.55 35.251,84.488 37.385,84.488 39.366,82.507 Q14.3@39.417,82.413
N$38: C_B7.2 C_B8.2 C_B9.2 IC8.12 IC8.13 | length 11.3
  Top w0.152: v1(16.659,5.392) 16.811,5.24 17.268,5.24 IC8.12@17.347,5.193 17.421,5.24 17.878,5.24 IC8.13@17.847,5.193
  Bottom w0.152: C_B9.2@15.4,13.876 15.287,13.774 15.287,12.25 14.677,11.641 C_B8.2@14.638,11.59 14.677,11.488 14.677,9.355 C_B7.2@14.638,9.304 14.677,9.202 15.135,9.202 16.659,7.678 v1(16.659,5.392)
N$39: D5.C R_R17.2 | length 5.1
  Top w0.152: D5.C@33.829,90.711 33.88,90.584 35.099,89.365 35.099,86.317 R_R17.2@35.241,86.18
N$40: D2.C R_R10.2 | length 4.4
  Top w0.152: D2.C@47.477,93.196 47.596,93.327 50.187,95.918 50.644,95.918 R_R10.2@50.709,96.004
N$41: Q11.3 R_R10.1 | length 9.5
  Top w0.152: Q11.3@41.449,98.034 41.5,97.899 41.652,97.747 50.644,97.747 R_R10.1@50.709,97.634
N$43: D7.2 LS1.1 Q15.3 | length 19.5
  Top w0.152: LS1.1@17.014,73.348 17.116,73.21 17.116,68.181 18.335,66.962 20.773,66.962 21.383,67.572 21.383,70.315 22.45,71.382 Q15.3@22.526,71.45 22.602,71.534 22.602,74.125 24.126,75.649 D7.2@24.177,75.659
N$44: C_EM11.1 C_EM12.2 D7.1 L7.1 LS1.2 | length 25.4
  Top w0.152: LS1.2@17.116,77.935 LS1.2@17.014,77.848 19.272,77.848 20.316,76.804 ; L7.1@19.529,67.978 19.554,68.029 19.554,69.705 21.84,71.991 ; C_EM12.2@21.383,77.87 20.316,76.804 ; v1(24.431,79.154) 24.431,78.24 24.279,78.087 D7.1@24.177,77.983 24.126,77.935 24.126,76.868 22.145,74.887 22.145,72.296 21.84,71.991 ; 20.316,76.804 20.316,73.515 21.84,71.991
  Bottom w0.152: C_EM11.1@23.274,79.662 23.325,79.611 23.974,79.611 v1(24.431,79.154)
N$45: D3.C R_R12.2 | length 13
  Top w0.152: D3.C@15.099,83.722 15.135,83.726 15.744,83.726 17.725,85.707 22.45,85.707 22.602,85.555 22.602,84.336 22.45,84.183 22.297,84.183 20.164,82.05 R_R12.2@20.138,82.015
N$46: Q12.3 R_R12.1 | length 34.3
  Top w0.152: R_R12.1@21.768,82.015 21.84,82.05 21.84,83.116 27.022,88.298 27.022,96.223 27.327,96.528 29.917,96.528 30.527,95.918 30.527,91.956 30.222,91.651 30.222,82.05 Q12.3@30.273,82.032
N$48: C_VCAP2.1 IC9.47 | length 10.6
  Top w0.152: v1(25.041,28.862) 25.041,28.405 25.803,27.643 C_VCAP2.1@25.941,27.592 ; v1(27.784,22.614) 28.241,22.156 29.003,22.156 IC9.47@29.095,22.056
  Bottom w0.152: v1(25.041,28.862) 27.784,26.119 v1(27.784,22.614)
N$51: D4.C R_R14.2 | length 7.3
  Top w0.152: R_R14.2@20.335,97.709 20.469,97.594 20.469,92.108 21.535,91.041 D4.C@21.628,90.923
N$52: Q13.3 R_R14.1 | length 6.7
  Top w0.152: R_R14.1@21.965,97.709 21.993,97.747 28.393,97.747 28.546,97.899 Q13.3@28.622,97.907
N$53: C_VCAP1.2 IC9.31 | length 3
  Top w0.152: C_VCAP1.2@29.709,32.686 29.765,32.672 30.679,32.672 31.594,31.758 31.594,31.148 IC9.31@31.595,31.056
N$63: Q18.3 R_LED1.1 | length 3.2
  Top w0.152: R_LED1.1@27.433,40.903 27.479,41.054 28.241,41.816 v1(28.241,42.883)
  Bottom w0.152: v1(28.241,42.883) 28.241,43.645 Q18.3@28.325,43.721
N$64: D11.C R_LED1.2 | length 2.6
  Top w0.152: R_LED1.2@27.433,39.273 27.479,39.378 29.765,39.378 D11.C@29.892,39.264
N$66: Q19.3 R_LED2.1 | length 3.3
  Top w0.152: R_LED2.1@31.996,40.889 32.051,40.902 v1(32.051,42.578)
  Bottom w0.152: v1(32.051,42.578) 33.118,43.645 Q19.3@33.151,43.721
N$67: D14.C R_LED2.2 | length 2
  Top w0.152: R_LED2.2@31.996,39.258 32.051,39.378 33.727,39.378 D14.C@33.829,39.264
N$69: D22.A R_LED9.1 | length 3.9
  Top w0.152: D22.A@8.97,10.882 8.886,11.031 8.124,11.793 8.124,12.86 8.886,13.622 8.886,13.927 R_LED9.1@8.982,14.05
N$70: Q20.3 R_LED3.1 | length 3.7
  Top w0.152: R_LED3.1@38.491,40.903 38.604,41.054 39.061,41.054 v1(39.519,41.511)
  Bottom w0.152: Q20.3@39.12,43.721 39.214,43.645 39.519,43.34 v1(39.519,41.511)
N$71: D17.C R_LED3.2 | length 2.1
  Top w0.152: D17.C@36.496,39.264 36.623,39.378 38.452,39.378 R_LED3.2@38.491,39.273
N$72: D23.A R_LED8.2 | length 1.6
  Top w0.152: D23.A@6.731,11.009 6.753,11.031 6.753,12.555 R_LED8.2@6.752,12.561
N$74: Q21.3 R_LED4.1 | length 3.7
  Top w0.152: R_LED4.1@42.382,40.776 42.414,40.902 v1(42.414,41.816)
  Bottom w0.152: v1(42.414,41.816) 44.243,43.645 Q21.3@44.2,43.721
N$75: D20.C R_LED4.2 | length 1.7
  Top w0.152: D20.C@40.687,39.264 40.738,39.225 42.262,39.225 R_LED4.2@42.382,39.146
NCS: IC7.22 IC9.17 | length 41.2
  Top w0.152: IC7.22@34.772,64.906 34.794,64.981 34.794,65.438 35.251,65.895 36.318,65.895 37.08,65.133 37.08,61.171 37.741,60.51 37.741,48.572 34.947,45.778 34.947,43.95 v1(37.385,41.511) ; IC9.17@38.595,31.056 38.604,31.148 39.061,31.605 v1(39.366,31.605)
  Bottom w0.152: v1(37.385,41.511) 37.385,33.586 v1(39.366,31.605)
R_EMITTER: IC9.39 Q11.1 R_R11.2 | length 120.5
  Top w0.152: v1(17.268,31.605) 20.011,28.862 v1(23.517,28.862) ; v1(17.878,41.054) 17.573,41.054 17.268,40.749 15.897,40.749 7.515,49.131 7.515,84.183 8.734,85.402 9.191,85.402 19.402,95.613 v1(19.402,97.899) ; v1(27.174,25.814) 27.327,25.966 29.003,25.966 IC9.39@29.095,26.056 ; Q11.1@40.499,95.834 40.585,95.918 41.805,97.137 v1(42.262,97.137)
  Bottom w0.152: v1(17.268,31.605) 17.268,40.444 v1(17.878,41.054) ; v1(19.402,97.899) 41.5,97.899 v1(42.262,97.137) 43.024,97.899 44.853,97.899 R_R11.2@44.932,98.028 ; v1(23.517,28.862) 26.565,25.814 v1(27.174,25.814)
R_RECEIVER_1: IC9.24 Q6.1 R_R4.2 | length 79.5
  Top w0.152: IC9.24@35.095,31.056 35.099,31.148 35.099,31.91 35.556,32.367 36.166,32.367 36.775,32.977 36.775,33.129 39.823,36.177 44.7,36.177 45.767,37.244 45.767,40.14 43.176,42.73 v1(43.176,49.131) ; v1(53.997,62.542) 53.997,65.921 56.181,68.105 56.181,74.531 v1(55.673,75.039) ; R_R4.2@58.295,76.313 58.416,76.411 58.416,76.716 59.178,77.478 v1(59.178,83.269)
  Bottom w0.152: v1(43.176,49.131) 43.176,49.741 53.997,60.561 v1(53.997,62.542) ; v1(55.673,75.039) 55.673,79.764 v1(59.178,83.269) 62.074,86.164 Q6.1@62.15,86.266
RENCHA: IC9.50 J3.6 | length 77.6
  Top w0.152: IC9.50@31.595,19.556 31.594,19.566 31.594,20.785 v1(32.965,22.156) ; v1(45.462,25.357) 52.32,25.357 53.387,24.29 57.959,24.29 60.093,26.424 60.093,34.501 61.921,36.33 62.074,36.33 62.836,37.092 62.836,49.284 54.301,57.818 54.301,61.323 55.521,62.542 57.045,62.542 57.959,63.457 J3.6@57.959,63.533
  Bottom w0.152: v1(32.965,22.156) 42.871,22.156 44.243,23.528 44.243,24.138 v1(45.462,25.357)
RENCHB: IC9.55 J3.5 | length 62.7
  Top w0.152: IC9.55@34.095,19.556 34.185,19.566 34.185,21.547 37.233,24.595 v1(37.233,26.728)
  Bottom w0.152: v1(37.233,26.728) 44.091,33.586 44.091,38.311 44.548,38.768 51.863,38.768 54.149,36.482 55.063,36.482 60.245,41.664 60.245,58.58 57.959,60.866 J3.5@57.959,60.993
RESET: C_RST.1 DS1.12 IC9.7 R_LED7.2 S3.1 | length 99.3
  Top w0.152: DS1.12@28.622,76.36 28.698,76.258 28.698,72.753 32.508,68.943 32.508,68.334 33.27,67.572 34.032,67.572 35.099,68.638 35.099,69.096 35.861,69.858 36.623,69.858 37.69,68.791 37.69,61.476 38.452,60.714 38.452,54.77 47.596,45.626 v1(47.596,37.549) ; IC9.7@40.595,24.556 40.738,24.595 v1(42.567,24.595) ; v1(46.224,27.795) v1(47.901,27.795) 51.711,27.795 v1(54.606,24.9) ; v1(53.539,19.718) 53.387,19.566 53.387,18.651 R_LED7.2@53.382,18.559 53.387,18.499 53.387,17.127 55.978,14.536 55.978,9.66 57.654,7.983 S3.1@57.687,7.869
  Bottom w0.152: v1(42.567,24.595) 43.024,24.595 v1(46.224,27.795) ; v1(47.596,37.549) 47.596,28.1 v1(47.901,27.795) ; C_RST.1@52.498,18.688 52.625,18.804 v1(53.539,19.718) 54.606,20.785 v1(54.606,24.9)
RF_EMITTER: IC9.41 Q13.1 R_R15.2 | length 110.3
  Top w0.152: v1(12.391,17.737) 13.001,18.346 13.001,18.651 19.554,25.204 26.565,25.204 26.717,25.052 29.003,25.052 IC9.41@29.095,25.056 ; v1(16.354,79.764) 20.773,79.764 28.089,87.079 28.089,92.565 R_R15.2@28.153,92.697 28.089,92.718 28.089,95.308 27.784,95.613 Q13.1@27.672,95.707
  Bottom w0.152: v1(12.391,17.737) 10.715,19.413 10.715,23.985 8.835,25.865 8.835,35.212 10.791,37.168 10.791,74.201 v1(16.354,79.764)
RF_RECEIVER: IC9.26 Q4.1 R_R2.2 | length 92.4
  Top w0.152: v1(28.851,78.087) 27.479,76.716 27.479,60.866 29.384,58.961 29.384,44.026 v1(29.765,43.645) ; IC9.26@34.095,31.056 34.185,30.996 v1(34.185,29.776) ; v1(43.633,78.087) 44.091,78.087 v1@51.711,85.707 ; v1(51.711,85.402) v1@51.711,85.707 ; Q4.1@54.728,94.73 54.606,94.699 54.606,92.108 51.711,89.212 v1@51.711,85.707
  Bottom w0.152: v1(28.851,78.087) 29.105,78.341 43.379,78.341 v1(43.633,78.087) ; v1(29.765,43.645) 29.765,41.968 30.527,41.206 30.527,39.225 34.794,34.958 34.794,32.062 34.185,31.453 v1(34.185,29.776) ; R_R2.2@50.003,84.441 50.894,84.586 v1(51.711,85.402)
RPWMA: IC6.2 IC9.59 R_PWMUP3.1 | length 34.3
  Top w0.152: R_PWMUP3.1@34.128,16.082 34.185,16.213 34.185,16.822 35.861,18.499 ; IC9.59@36.095,19.556 36.013,19.413 36.013,18.651 35.861,18.499 ; v1(36.166,18.194) 35.861,18.499 ; v1(40.585,18.194) v1(42.567,20.175) ; v1(49.729,35.872) 51.101,37.244 IC6.2@51.101,39.066
  Bottom w0.152: v1(36.166,18.194) v1(40.585,18.194) ; v1(42.567,20.175) 49.729,27.338 v1(49.729,35.872)
RPWMB: IC6.4 IC9.58 R_PWMUP4.1 | length 35.5
  Top w0.152: R_PWMUP4.1@31.842,16.016 31.899,16.06 32.813,16.06 35.556,18.804 35.556,19.413 IC9.58@35.595,19.556 35.709,19.566 v1(35.709,20.937) ; v1(48.51,37.701) 48.51,38.92 IC6.4@48.561,39.066
  Bottom w0.152: v1(35.709,20.937) 42.871,20.937 49.425,27.49 49.425,28.862 48.51,29.776 v1(48.51,37.701)
RS: DS1.5 IC9.38 | length 66.8
  Top w0.152: v1(17.725,25.509) 25.955,25.509 27.022,26.576 29.003,26.576 IC9.38@29.095,26.556 ; v1(31.289,48.522) 31.289,60.104 v1(31.746,60.561)
  Bottom w0.152: v1(17.725,25.509) 17.725,31.148 24.736,38.158 24.736,45.474 27.784,48.522 v1(31.289,48.522) ; v1(31.746,60.561) 31.237,61.07 31.237,62.135 37.842,68.74 DS1.5@38.782,68.74
RX: IC9.43 J4.5 | length 25.1
  Top w0.152: IC9.43@29.095,24.056 29.003,23.985 28.241,23.985 27.174,22.918 27.174,13.774 31.441,9.507 32.356,9.507 33.118,8.745 33.118,7.831 33.88,7.069 35.556,7.069 36.775,8.288 J4.5@36.877,8.288
SCLK: IC7.23 IC9.21 | length 57.9
  Top w0.152: IC7.23@34.372,64.906 34.337,64.981 34.337,65.438 35.099,66.2 36.471,66.2 37.385,65.286 37.385,61.323 38.045,60.663 38.045,48.42 35.251,45.626 35.251,45.016 38.147,42.121 39.823,42.121 42.109,39.835 43.176,39.835 v1(44.853,38.158) ; IC9.21@36.595,31.056 36.623,30.996 36.623,30.234 38.909,27.948 v1(38.909,27.49) ; v1(41.957,28.252) v1(45.462,31.758)
  Bottom w0.152: v1(38.909,27.49) 39.671,28.252 v1(41.957,28.252) ; v1(44.853,38.158) 45.462,37.549 v1(45.462,31.758)
SDI: IC7.24 IC9.23 | length 59.1
  Top w0.152: v1(21.535,35.872) v1(23.974,33.434) ; v1(25.345,60.866) 25.345,48.674 v1(25.498,48.522) ; v1(31.899,26.576) 35.556,30.234 35.556,30.996 IC9.23@35.595,31.056 ; v1(31.899,64.828) 33.88,64.828 IC7.24@33.972,64.906
  Bottom w0.152: v1(21.535,35.872) 21.535,42.73 26.107,47.302 26.107,47.912 v1(25.498,48.522) ; v1(23.974,33.434) 24.583,33.434 25.193,32.824 25.193,30.538 29.155,26.576 v1(31.899,26.576) ; v1(25.345,60.866) 29.308,64.828 v1(31.899,64.828)
SDO: IC7.9 IC9.22 | length 37.1
  Top w0.152: v1(30.984,41.664) 30.984,42.426 31.899,43.34 31.899,53.551 33.778,55.43 33.778,60.023 34.772,61.017 IC7.9@34.772,61.906 ; v1(36.013,29.776) 36.013,30.996 IC9.22@36.095,31.056
  Bottom w0.152: v1(30.984,41.664) 30.984,39.225 36.013,34.196 v1(36.013,29.776)
TX: IC9.42 J4.7 | length 27.7
  Top w0.152: v1(26.26,17.584) 24.888,18.956 24.888,19.566 25.193,19.87 25.955,19.87 26.869,20.785 26.869,23.071 28.241,24.442 29.003,24.442 IC9.42@29.095,24.556
  Bottom w0.152: v1(26.26,17.584) 28.241,17.584 30.222,15.603 31.289,15.603 35.709,11.184 35.709,10.269 36.471,9.507 38.147,9.507 39.366,8.288 J4.7@39.417,8.288
V_BAT: C_B1.1 C_B2.1 C_VBAT2.1 IC8.9 L6.1 S2.3 XFL4020.2 | length 72.1
  Top w0.152: v1(13.306,6.307) 15.592,8.593 ; v1(17.268,16.06) v1@16.963,16.06 ; IC8.9@17.347,8.493 17.268,8.593 15.592,8.593 ; L6.1@18.065,13.306 16.963,14.408 v1@16.963,16.06 ; v1(38.452,4.021) 46.529,4.021 47.748,2.802 48.51,2.802 S2.3@48.577,2.78 48.663,2.802 52.32,6.459 52.32,8.593 XFL4020.2@52.373,8.609 ; 15.592,8.593 15.439,8.593 13.763,10.269 C_VBAT2.1@13.622,10.32 13.763,10.422 14.068,10.726 14.068,13.165 v1@16.963,16.06
  Bottom w0.152: C_B1.1@9.117,7.195 12.056,7.195 C_B2.1@12.075,7.214 ; C_B2.1@11.934,7.221 C_B2.1@12.075,7.214 ; v1(13.306,6.307) 12.544,7.069 12.087,7.069 C_B2.1@12.075,7.214 ; v1(17.268,16.06) 23.161,16.06 23.923,15.298 30.679,15.298 32.965,13.012 32.965,7.983 35.556,5.392 35.556,3.868 36.471,2.954 37.385,2.954 v1(38.452,4.021)
V_BAT_FILTER: C_VBAT1.1 C_VBAT3.2 C_VBAT4.2 IC1.7 IC1.8 R_VM1.2 XFL4020.1 | length 71.8
  Top w0.152: v1(17.729,20.131) 18.487,20.328 IC1.7@18.638,20.334 18.64,20.328 18.64,19.566 18.638,19.534 18.64,19.413 18.64,18.194 19.554,17.28 19.554,16.365 C_VBAT1.1@19.619,16.289 19.707,16.213 19.707,13.317 C_VBAT3.2@19.619,13.241 19.707,13.165 20.621,12.25 v1(24.583,12.25) ; C_VBAT4.2@23.175,16.162 23.212,16.213 23.212,17.28 v1(23.669,17.737) ; v1(30.679,6.154) 38.63,6.154 38.604,6.129 40.128,4.605 47.723,4.605 51.406,8.288 51.406,9.812 52.32,10.726 52.32,11.793 XFL4020.1@52.373,11.809
  Bottom w0.152: v1(17.729,20.131) 19.249,21.699 ; v1(23.669,17.737) 23.212,17.737 19.249,21.699 ; R_VM1.2@24.248,31.965 24.126,31.91 24.126,30.386 19.859,26.119 19.859,22.309 19.249,21.699 ; v1(24.583,12.25) v1(30.679,6.154)
V_BOOST: C_B7.1 C_B8.1 C_B9.1 C_M1.1 C_M2.2 C_M4.2 C_M5.1 C_MB_L.2 C_MB_R.2 IC5.6 IC6.6 IC8.14 IC8.15 IC8.16 Q1.7 Q2.7 R_B4.2 | length 209.2
  Top w0.152: 12.061,25.662 12.187,25.787 12.187,27.14 11.937,27.39 11.937,37.247 12.061,37.371 ; 12.696,9.355 12.696,11.184
  Top w0.203: 10.766,13.114 12.696,11.184
  Top w0.305: 10.766,13.114 10.766,24.483 11.492,25.209 11.608,25.209 12.061,25.662 ; v1(11.629,8.44) v1@11.629,8.288 ; 12.061,37.371 12.061,37.879 12.595,38.412 12.696,38.311 ; 12.188,1.379 12.187,1.379 ; 12.696,9.355 v1@11.629,8.288 ; v1(13.001,40.749) 13.001,39.835 12.696,39.53 Q1.7@12.62,39.448 12.696,39.378 12.696,38.311 ; IC8.14@18.347,5.193 IC8.14@18.335,5.24 ; IC8.16@19.347,5.193 19.249,5.24 18.945,5.24 IC8.15@18.847,5.193 18.792,5.24 IC8.14@18.335,5.24 ; IC5.6@20.367,39.32 20.367,38.617 20.346,38.595 19.021,37.269 13.738,37.269 12.696,38.311 ; IC6.6@49.831,33.644 49.831,32.978 49.832,32.976 50.441,32.367 v1(51.711,32.367) ; v1(54.911,58.123) v1(56.13,58.123) 63.395,50.858 63.395,36.685 60.905,34.196 v1(60.702,34.196) ; v1(56.587,32.367) 57.654,33.434 57.654,33.739 Q2.7@57.705,33.77 ; v1@11.629,8.288 11.629,8.059 8.658,5.088 8.658,3.945 10.224,2.378 R_B4.2@10.461,2.319 10.579,2.023 11.223,1.379 12.187,1.379 ; 12.187,1.379 12.335,1.527 12.617,1.527 12.83,1.74 12.949,1.74 13.027,1.818 13.027,2.323 13.328,2.624 14.373,2.624 14.83,3.081 16.586,3.081 18.283,4.778 18.283,5.188 IC8.14@18.335,5.24
  Bottom w0.305: v1(11.629,8.44) 12.391,9.202 12.849,9.202 C_B7.1@12.888,9.304 13.001,9.355 13.001,11.488 C_B8.1@12.888,11.59 13.001,11.641 13.611,12.25 13.611,13.774 C_B9.1@13.65,13.876 ; v1(13.001,40.749) 12.874,40.876 12.874,43.721 13.407,44.254 14.22,44.254 C_MB_L.2@14.351,44.342 14.373,44.407 17.116,44.407 C_M2.2@17.145,44.342 17.268,44.407 19.859,44.407 C_M1.1@19.939,44.342 20.011,44.407 20.011,57.056 22.78,59.825 30.806,59.825 46.377,44.254 50.491,44.254 C_M5.1@50.593,44.215 50.644,44.254 54.301,44.254 C_M4.2@54.403,44.215 54.454,44.254 54.911,44.712 v1(54.911,58.123) ; v1(51.711,32.367) v1(56.587,32.367) 56.714,32.494 59,32.494 v1(60.702,34.196) ; v1(56.13,58.123) 58.721,55.532 58.721,44.254 C_MB_R.2@58.848,44.215
VOL_METER: IC9.27 R_VM1.1 R_VM2.2 | length 12.5
  Top w0.152: IC9.27@33.595,31.056 33.575,31.148 v1(33.575,32.672) 33.88,32.977 35.404,32.977 R_VM2.2@35.531,33.039
  Bottom w0.152: R_VM1.1@25.878,31.965 25.955,32.062 27.479,33.586 32.661,33.586 v1(33.575,32.672)
VOL_METER_BOOST: IC9.11
pads on no net: DS1.1 DS1.2 IC3.1 IC5.1 IC5.8 IC6.1 IC6.8 IC7.1 IC7.2 IC7.3 IC7.4 IC7.5 IC7.6 IC7.7 IC7.14 IC7.15 IC7.16 IC7.17 IC7.19 IC7.21 IC9.8 IC9.25 IC9.35 LS1.3 S1.2 S1.3 S3.2 S3.3

## Polygon pours and split planes (outlines as drawn)
GND on Bottom "Polygon_1_Net_GND" (solid, remove dead copper, pour order 0): 7.635,101.346 61.268,101.346 72.583,90.031 72.583,6.238 62.538,-3.806 11.365,-3.806 -3.679,11.238 -3.679,90.031
GND on Top "Polygon_2_Net_GND" (solid, remove dead copper, pour order 1): -5.029,105.076 61.188,105.076 75.123,91.141 75.123,4.968 63.808,-6.346 11.285,-6.346 -5.029,9.968

## Keep-outs
Top:
  region: 61.159,15.619 61.159,41.619 65.159,41.619 65.159,15.619
  region: 5.189,58 5.189,82 9.189,82 9.189,58
  region: 5.062,16 5.062,42 9.062,42 9.062,16
  region: 61.112,57.746 61.112,81.746 65.112,81.746 65.112,57.746
  region: 45.159,41.619 45.159,57.619 65.159,57.619 65.159,41.619
  region: 5.062,42 5.062,58 25.062,58 25.062,42
  lines w0.152: -4.953,30 5.047,30 ; -4.953,70 5.047,70 ; 0.047,50 70.047,50 ; 35.047,-5 35.047,105 ; 65.047,30 75.047,30 ; 65.047,70 75.047,70
Keep-Out Layer:
  the board outline again, w0

## Silkscreen, mask and mechanical layers (free items; w line width, h text height)
Bottom Overlay:
  text "Bubble 1.0" at 40.047,50 h1.42
  text "Designed by Thamara" at 40.914,49.147 h0.52
Dimension:
  the board outline again, w0

## Dimensions
0.047,50 to 0.047,15 on tFinish
5.062,15 to 5.047,85 on tFinish
10.075,99.971 to 10.047,0 on tFinish
70.047,85 to 0.047,85 on tFinish
5.059,84.994 to 65.047,85 on tFinish
10.075,99.971 to 60.047,100 on tFinish
10.075,99.971 to 0.047,90 on tFinish

## Text inside footprints (layer, text, board x,y; h text height)
J2: tPlace "6" at 20.084,63.069 h1.08; tPlace "1" at 12.845,58.243 h1.08
J3: tPlace "6" at 59.483,62.898 h1.08; tPlace "1" at 52.244,58.072 h1.08